# Altium PCB PCB2.PcbDoc
Units mm, origin at the board's own origin, x right, y up, seen from the top; angles counter-clockwise.
Board outline 57.5 x 65 mm, 2 copper layers (Top Layer, Bottom Layer); 16 components, 6 nets, 40 pads, 43 vias.
Unrouted connection lines stored in the file: 6.
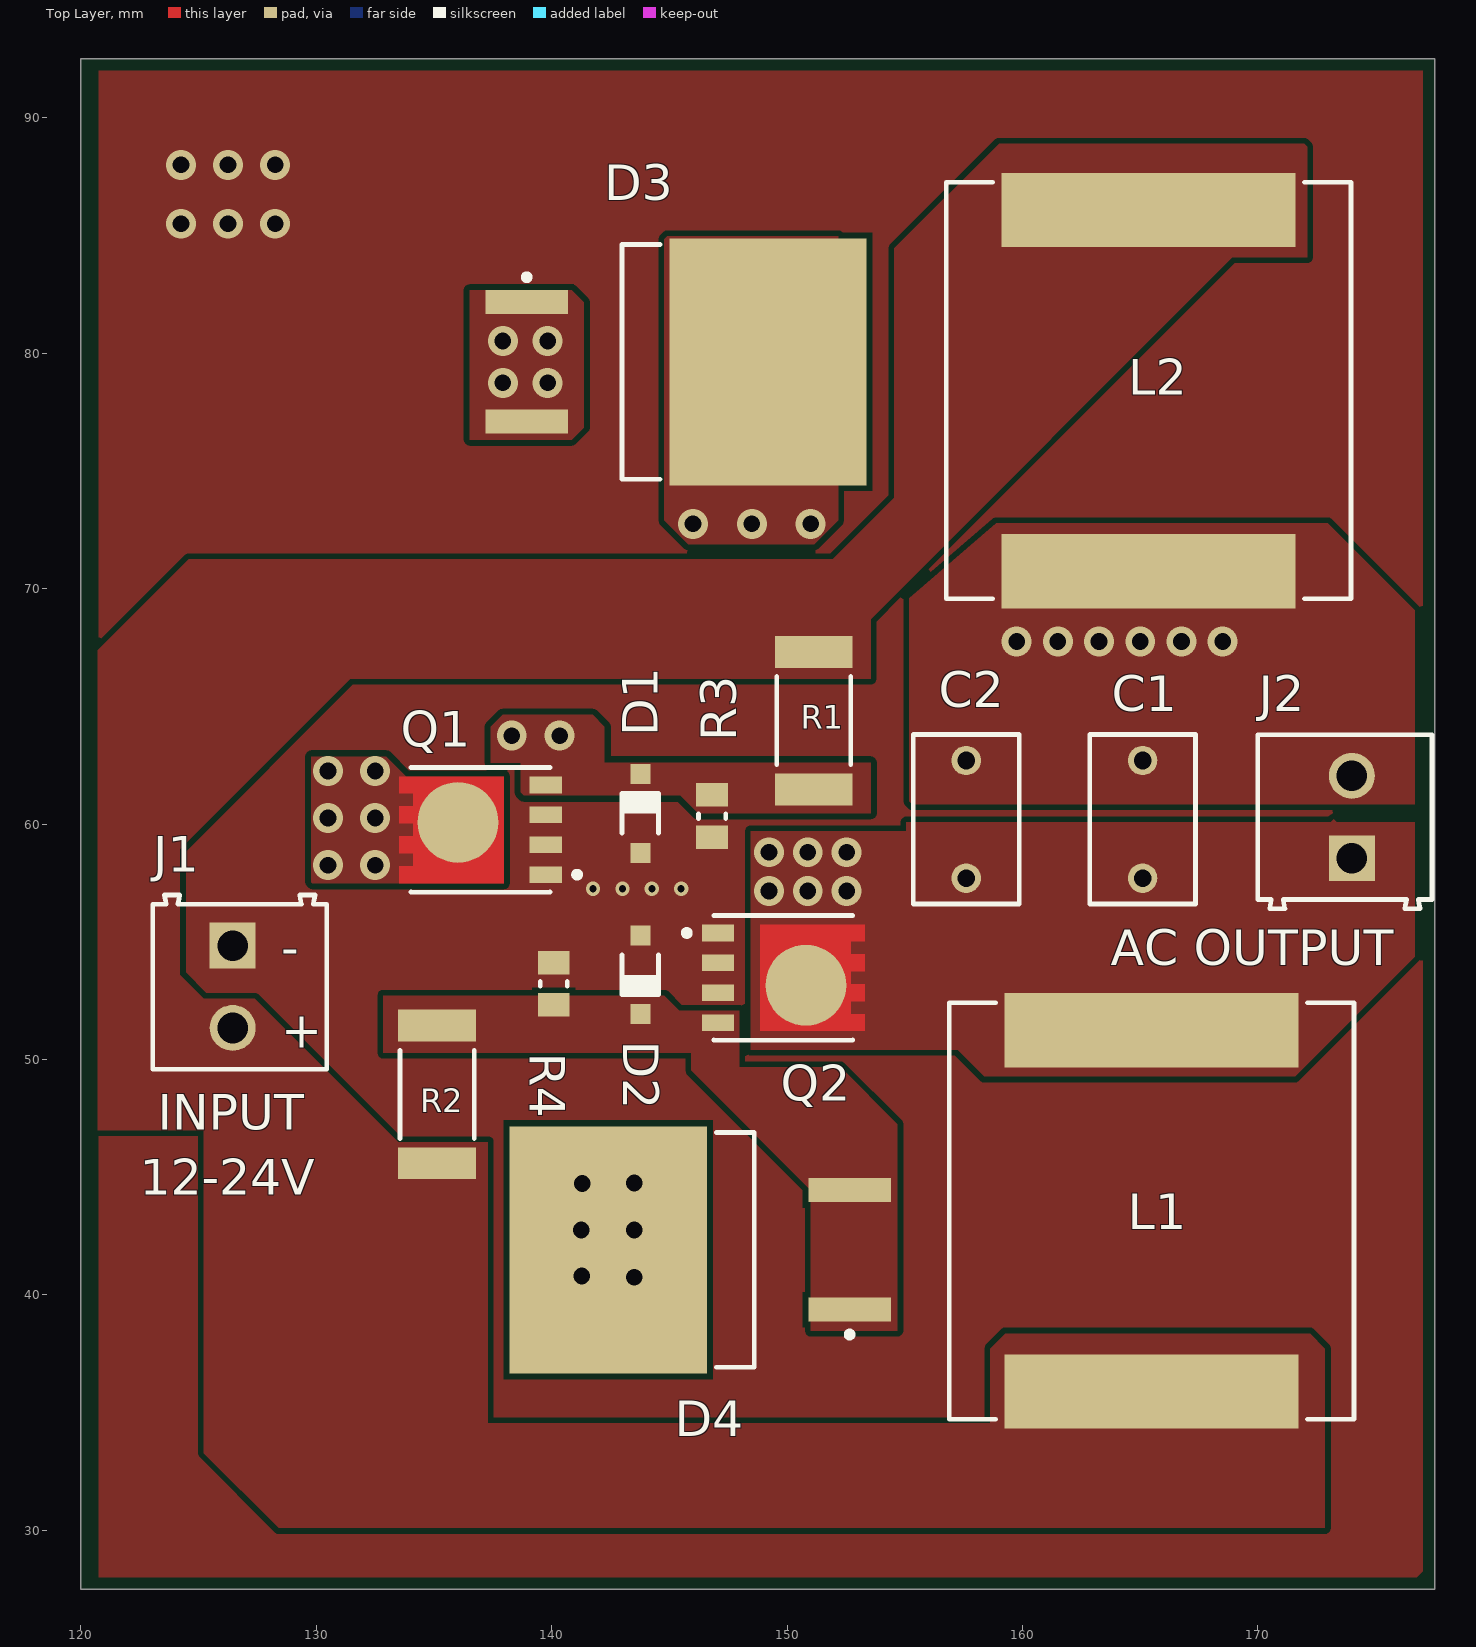
[diagram p0: Top Layer view]
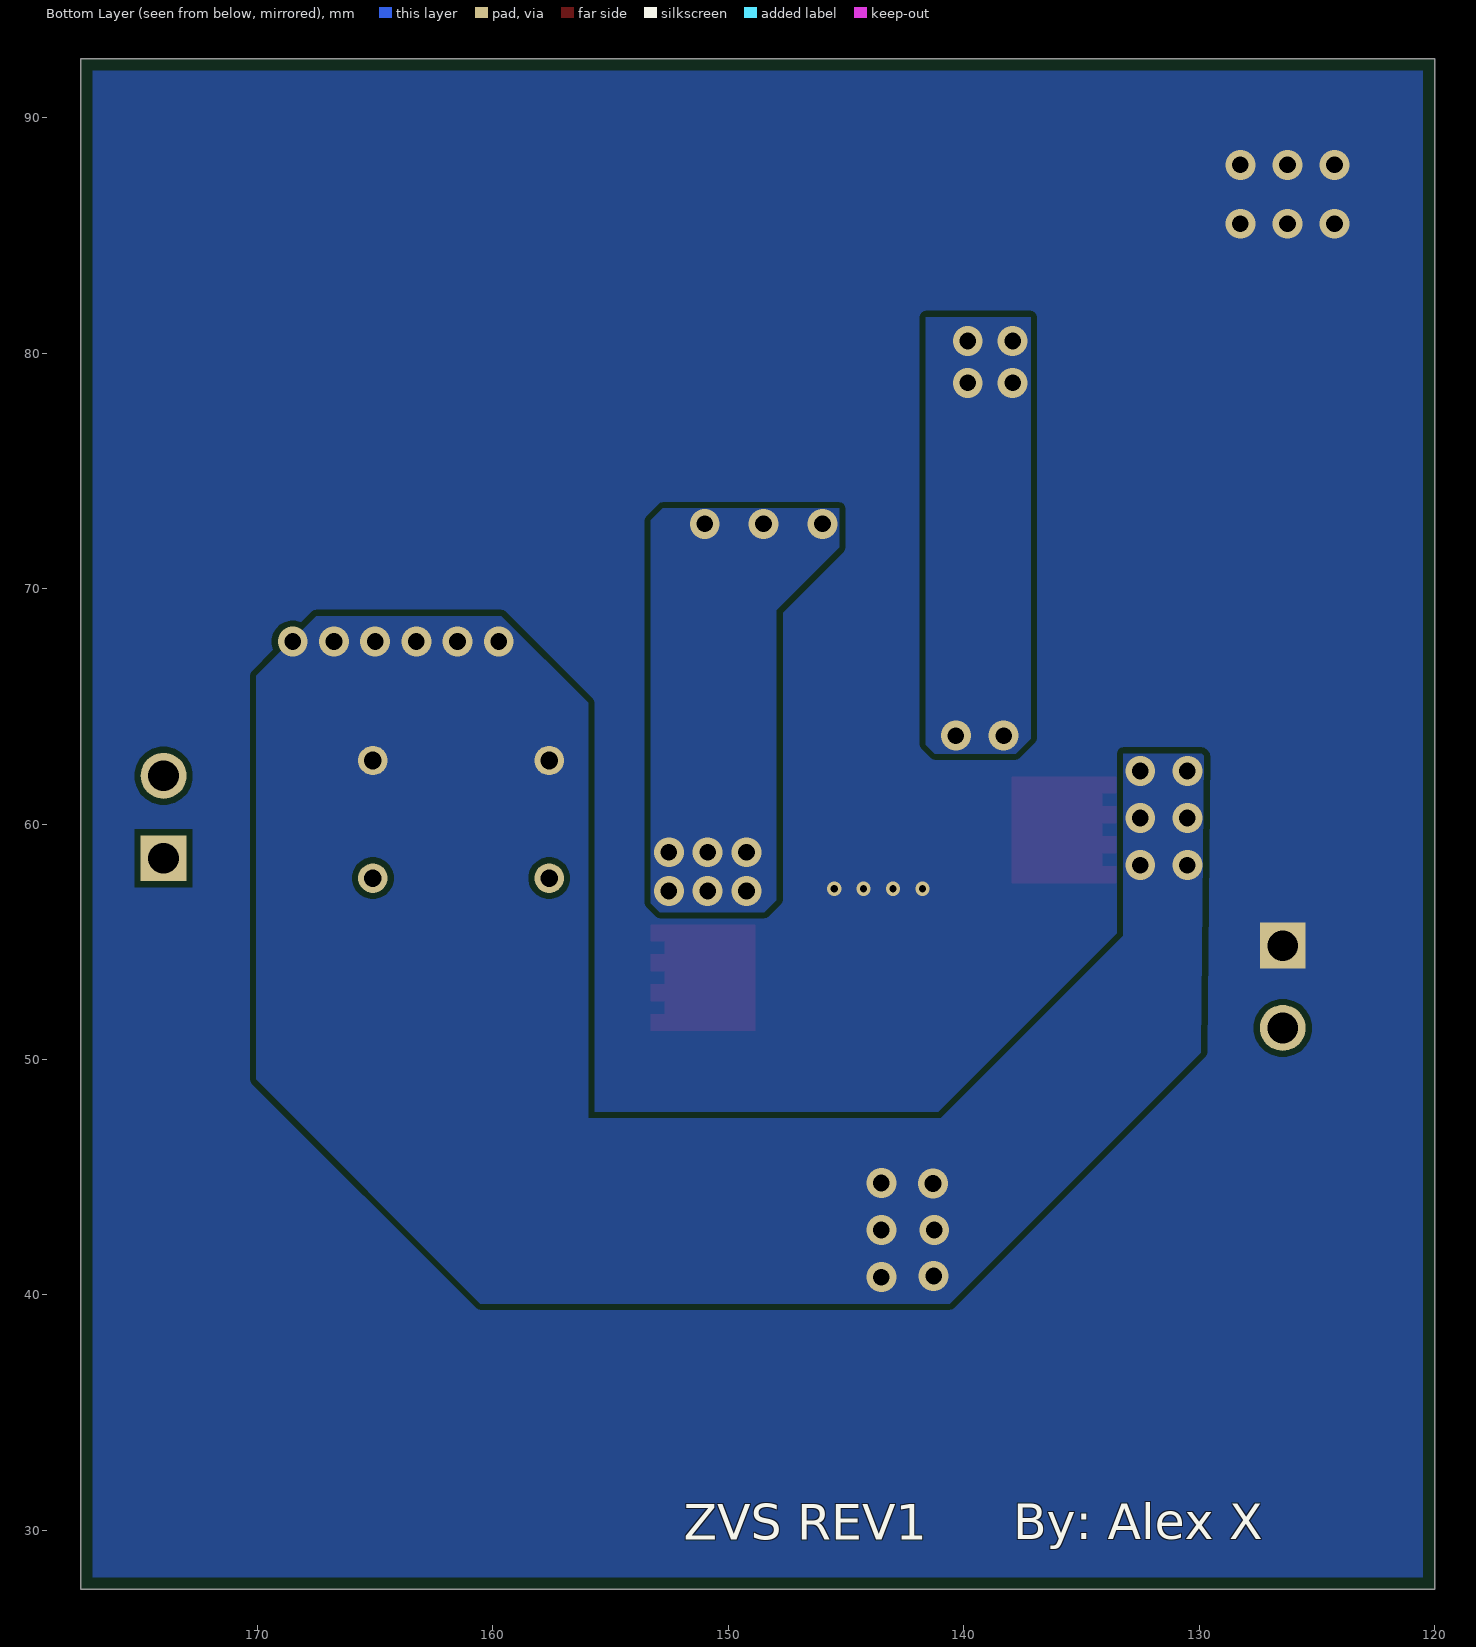
[diagram p1: Bottom Layer view, seen from below]
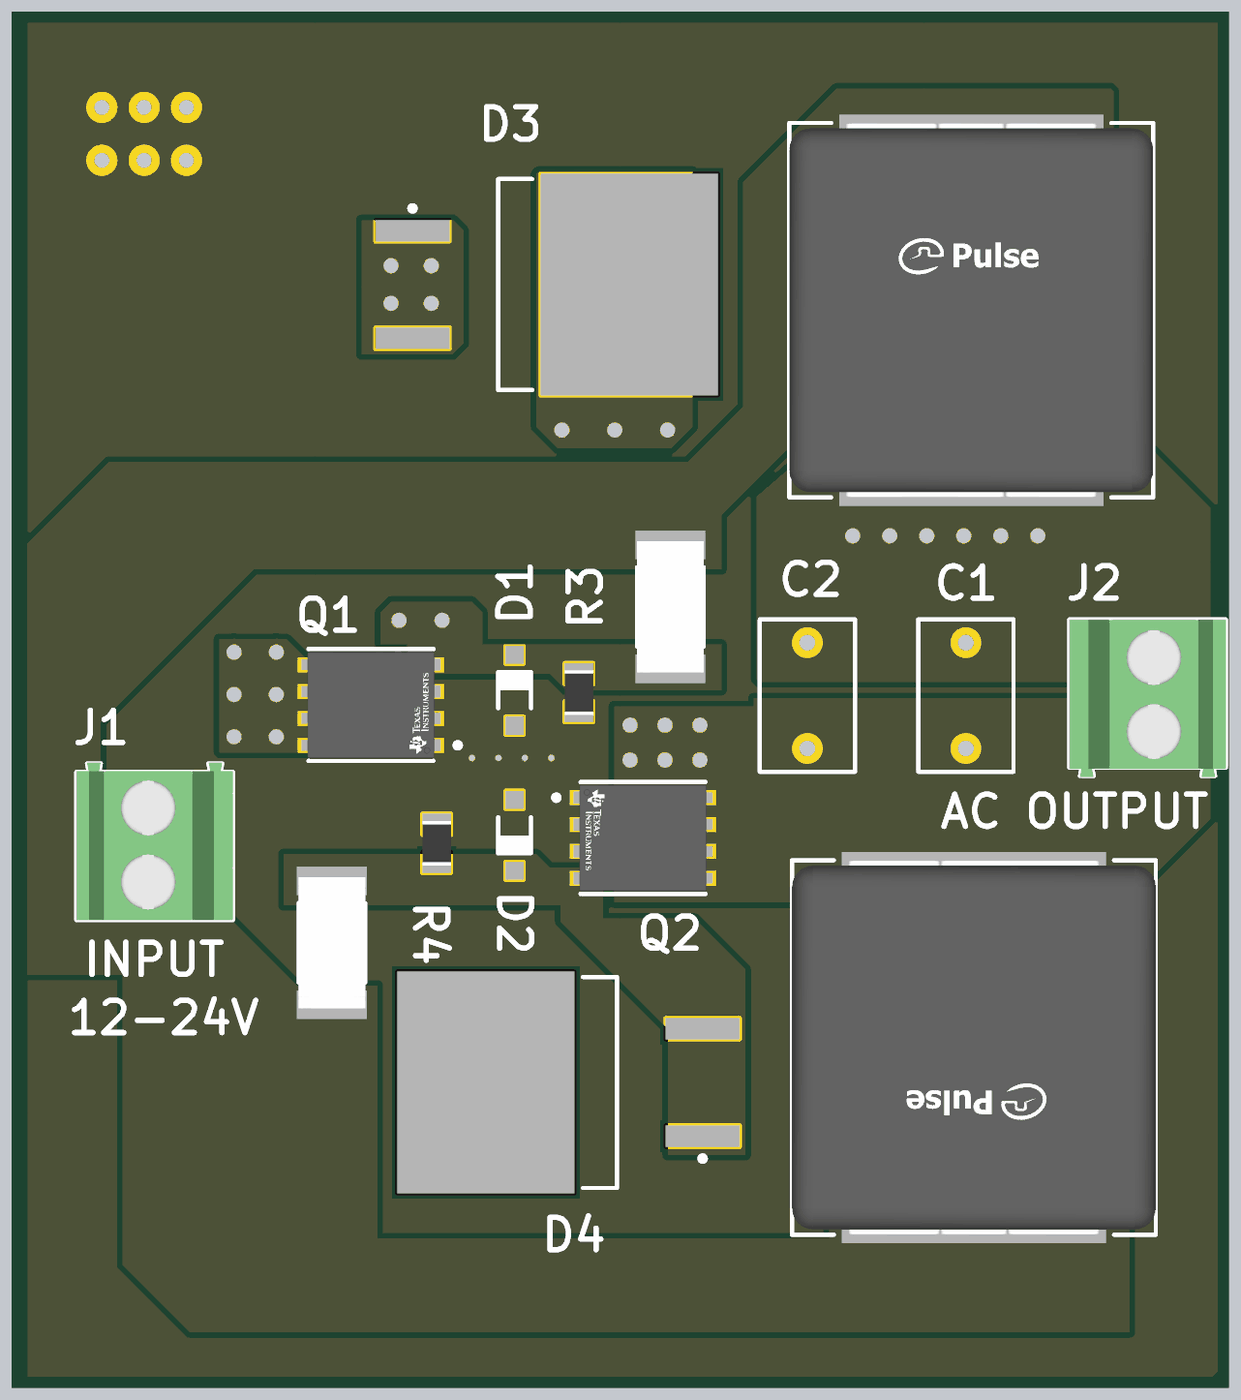
[diagram p2: 3D render of the assembled board from above, using the file's embedded part models]

## Layer stack, top to bottom
Top Solder: solder mask 0.0102, Solder Resist, Dk 3.5
Top Layer: signal copper 0.0356
Dielectric 1: dielectric 0.32, FR-4, Dk 4.8
Bottom Layer: signal copper 0.0356
Bottom Solder: solder mask 0.0102, Solder Resist, Dk 3.5

## Board outline
125,92.5 124.374,92.5 177.5,92.5 177.5,27.5 147.153,27.5 120,27.5 120,92.5 127.5,92.5

## Design rules (kind name [scope] priority, off if disabled: settings)
Clearance [All] p1: gap=0.254 ignorepadtopadclearanceinfootprint=FALSE except(0: Arc-Hole Track-Hole SMDPad-Hole THPad-Hole Via-Hole Fill-Hole Poly-Hole Region-Hole Text-Hole)
PolygonConnect [All] p1: connectstyle=Direct reliefconductorwidth=0.254 reliefentries=4 polygonreliefangle="90 Angle" airgapwidth=0.254
RoomDefinition zvs_circuit [InComponentClass('zvs_circuit')] p1: confinementstyle=ConfineIn formatcopy=TRUE lockcomponents=FALSE outline 110,11.306 191.667,11.306 191.667,101.75 110,101.75
RoutingVias [All] p1: holewidth=0.3 width=0.6 viastyle="Through Hole" minholewidth=0.25 minwidth=0.5 maxholewidth=0.711 maxwidth=2
SolderMaskExpansion [All] p1: expansion=0.102 istentingtop=FALSE
Width [All] p1: maxlimit=0.254 minlimit=0.254 preferedwidth=0.254
30 further rules are at their usual default settings.

## Components (designator, comment, footprint, x,y, rotation, side; value= is the part's Value field where it differs from the comment)
C1 "0.47uF" WIMA-MKS2D034701E00 165.1,60.198 r270 top
C2 "0.47uF" WIMA-MKS2D034701E00 157.607,60.198 r270 top
D1 "15V Zener" VISH-SOD-123-2_V 143.764,60.452 r90 top
D2 "15V Zener" VISH-SOD-123-2_V 143.764,53.594 r270 top
D3 "SBRB1045T4G" ONSC-D2PAK-3-418B-04_V 145.288,79.629 r0 top
D4 "SBRB1045T4G" ONSC-D2PAK-3-418B-04_V 146.304,41.91 r180 top
J1 "input" 691214110002 126.746,53.086 r270 top
J2 "output" 691214110002 173.69,60.297 r90 top
L1 "100uH" FP-PA4344_104NLT-MFG 165.481,43.561 r180 top
L2 "100uH" FP-PA4344_104NLT-MFG 165.354,78.414 r0 top
Q1 "CSD19502Q5B" FP-DNK0008A-MFG 136.975,59.753 r180 top
Q2 "CSD19502Q5B" FP-DNK0008A-MFG 149.836,53.467 r0 top
R1 "470" FP-CRCW2512-e3-IPC_B 151.13,64.389 r270 top
R2 "470" FP-CRCW2512-e3-IPC_B 135.128,48.514 r90 top
R3 "10K" RESC2013X60X35NL10T20 146.812,60.336 r90 top
R4 "10K" RESC2013X60X35NL10T20 140.081,53.213 r270 top

## Footprints (in the part's own frame and the unit in brackets; to place one, negate y for a bottom-side part, rotate by r counter-clockwise, add the part's x,y. Pads: shape width x height; smd on the part's side, far side on the other; paste and mask are expansions set on the pad)
691214110002 [mm] "3.50 mm Horizontal Entry Modular, 2p"
  rect 1.95x1.95 hole 1.3: 1(-1.75,-0.3)
  round 1.95 hole 1.3: 2(1.75,-0.3)
  silkscreen extent -3.9,-3.7 3.5,3.7, body extent -3.95,-3.7 3.5,3.7, height 8.55
FP-CRCW2512-e3-IPC_B [mm]
  rect 1.355x3.308 smd paste+0 mask+0: 1(-2.926,0) 2(2.926,0)
  silkscreen extent -1.87,-1.58 1.87,1.58, body extent -3.85,-1.9 3.85,1.9, height 0.25
FP-DNK0008A-MFG [mm]
  rect 1.372x0.71 smd paste-1000 mask+0: 1(-2.77,1.905) 2(-2.77,0.635) 3(-2.77,-0.635) 4(-2.77,-1.905)
  round 3.434 smd paste-1000 mask+0: 5-6-7-8(0.958,-0.317)
  Top Layer region: -0.984,-2.26 3.456,-2.26 3.456,-1.55 2.866,-1.55 2.866,-0.99 3.456,-0.99 3.456,-0.28 2.866,-0.28 2.866,0.28 3.456,0.28 3.456,0.99 2.866,0.99 2.866,1.55 3.456,1.55 3.456,2.26 -0.984,2.26
  silkscreen extent -4.23,-2.65 2.95,2.65, body extent -3.56,-2.65 3.56,2.65, height 0.25
FP-PA4344_104NLT-MFG [mm]
  rect 12.5x3.15 smd paste+0 mask+0: 1(0,7.675) 2(0,-7.675)
  silkscreen extent -8.6,-8.85 8.6,8.85, body extent -8.7,-9.35 8.7,9.35, height 0.25
ONSC-D2PAK-3-418B-04_V [mm] "DPAK, 3-Leads, Body 9.97x9.145mm, Pitch 2.54mm"
  rect 3.504x1.016 smd: 1(-6.35,2.54) 3(-6.35,-2.54)
  rect 8.38x10.49 smd: 4(3.9,0)
  silkscreen extent -6.47,-4.98 -0.69,4.98, body extent -2.3,-4.98 6.85,4.98, height 4.83
RESC2013X60X35NL10T20 [mm] "Chip Resistor, 2-Leads, Body 2.1x1.35mm, IPC Medium Density"
  rect 1x1.35 smd: 1(-0.9,0) 2(0.9,0)
  silkscreen extent -0.1,-0.58 0.1,0.58, body extent -1.05,-0.68 1.05,0.67, height 0.6
VISH-SOD-123-2_V [mm] "SMD, 2-Leads, Body 2.7x1.55mm, Height 1.35mm"
  rect 0.85x0.85 smd: 1(-1.675,0) 2(1.675,0)
  silkscreen extent -0.85,-0.77 0.85,0.78, body extent -1.35,-0.77 1.35,0.77, height 1.35
WIMA-MKS2D034701E00 [mm] "THD, 2-Leads, Body 7.2x4.5mm, Pitch 5mm"
  round 1.25 hole 0.75: 1(-2.5,0) 2(2.5,0)
  silkscreen extent -3.6,-2.25 3.6,2.25, body extent -3.6,-2.25 3.6,2.25, height 9.5

## Part data
C1 C2: library part CMP-2000-06717-1, "Metallized Polyester (PET) Capacitor, 0.47 uF, +/- 10%, 100 V DC, 63 V AC, -55 to 100 degC, 2-Pin THD, RoHS, Bulk", Capacitance=0.47µF, Capacitance Tolerance=±10%, Capacitor Case Style=-, Capacitor Dielectric Type=PET(Polyester), Capacitor Terminals=RadialLeaded, Manufacturer=Wima, Operating Temperature Max=100°C, Operating Temperature Min=-55°C, Package Description="2-Pin Through Hole Device, Body 7.2 x 4.5 mm, Pitch 5 mm", Package Reference=MKS2D034701E00, Voltage Rating=100V, Automotive Qualification Standard=-, Datasheet URL=http://www.wima.com/EN/WIMA_MKS_2.pdf, Datasheet Version=04/2016, Lead Spacing=5mm, Manufacturer URL=http://www.wima.com/, Mounting Technology=ThroughHole, Packaging=Each, Product Range=MKS2Series, SVHC=NoSVHC(15-Jun-2015)
D1 D2: library part CMP-0931-00033-1, "Small Signal Zener Diode, 15 V +/- 5%, -55 to 155 degC, 2-Pin SOD-123, RoHS, Tape and Reel", Manufacturer="Vishay Semiconductor", Operating Temperature="-55 to 150 degC", PartNumber=MMSZ5245B-E3-08, Power Dissipation (mW)=500, Test Current (IZT1) (mA)=8.5, Tolerance="+/- 5%", Zener Voltage (NOM.) (V)=15, ComponentLink1Description="Manufacturer URL", ComponentLink1URL=http://www.vishay.com/, ComponentLink2Description=Datasheet, ComponentLink2URL=http://www.vishay.com/docs/85774/mmsz5225.pdf, ComponentLink3Description="Package Specification", ComponentLink3URL=http://www.vishay.com/docs/85774/mmsz5225.pdf, DatasheetVersion="Rev. 1.9", Int. Construction=Single, Mounting Technology="Surface Mount", PackageDescription="2-Pin SMD, Body 2.7 x 1.55 mm, Height 1.35 mm", PackageReference=SOD-123-2, PackageVersion="Rev. 1.9", Packing="Tape and Reel", RoHS=TRUE, Zener Impedance (IZT1) (Max.) (Ohm)=16
D3 D4: library part CMP-1055-00091-1, "SWITCHMODE(TM) Schottky Power Rectifier, Surface Mount Power Package, 3-Pin D2PAK, Pb-Free, Tape and Reel", Manufacturer="On Semiconductor", ComponentLink1Description="Manufacturer URL", ComponentLink1URL=http://www.onsemi.com/, ComponentLink2Description=Datasheet, ComponentLink2URL=http://www.onsemi.cn/pub_link/Collateral/MBRB1045-D.PDF, ComponentLink3Description="Package Specification", ComponentLink3URL=http://www.onsemi.com/pub_link/Collateral/418B-04.PDF, Configuration=Single, DatasheetVersion="Rev. 8", IFSM Max (A)=150, Mounting Technology="Surface Mount", PackageDescription="3-Pin Flange Mount, Body 9.145 x 9.97 mm, Pitch 2.54 mm", PackageReference=D2PAK-3-418B-04, PackageVersion="Rev. K, 09/2008", Packing="Tape and Reel", PartNumber=SBRB1045T4G, RoHS=TRUE
J1 J2: library part CMP-1502-02464-1, "Serie 2141 - 3.50 mm Horizontal Entry Modular with Rising Cage Clamp WR-TBL, 2 pin", Manufacturer="Wurth Elektronik", Operating Temperature=-40to105degC, Package Reference=691214110002, Datasheet URL=http://katalog.we-online.de/em/datasheet/6912141100xx.pdf, Manufacturer URL=http://www.we-online.de, Mounting Technology=THT, Packaging=Box, Part Number=691214110002, Pin Number=2, Pitch=3.50mm, Publisher=WurthElektronik
L1 L2: library part CMP-16293-000004-1, "FIXED IND 100UH 5.3A 118 MOHM", Manufacturer="Pulse Electronics", Manufacturer Part Number=PA4344.104NLT, Package=0, Rms Current=5.3A, Saturation Current=6.5A, Series Resistance=118mΩ, Temperature="-55°C to +125°C", Temperature Range High=+125°C, Temperature Range Low=-55°C, Test Frequency=100kHz, Tolerance=20%, Automotive=No, Category=Ind, ComponentLink2Description=Datasheet, ComponentLink2URL=https://products.pulseelex.com/files/product_files/P771.pdf, Composition=Molded, Device Class L1="Passive Components", Device Class L2=Inductors, Device Class L3="Fixed Inductors", Digikey Description="FIXED IND 100UH 5.3A 118 MOHM", Height=7mm, Inductance=100uH, Lead Free=Yes, Octopart=https://octopart.com/pa4344.104nlt-pulse-65154399, RoHS=TRUE, Shielding=true
Q1 Q2: library part CMP-04962-000029-1, "MOSFET N-CH 80V 100A 8SON", Continuous Drain Current (ID)=100A, Drain To Source Breakdown Voltage=80V, Drain To Source Resistance=3.4mR, Gate to Source Voltage (Vgs)=20V, Input Capacitance=4.87nF, Max Operating Temperature=150°C, Max Power Dissipation=3.2W, Min Operating Temperature=-55°C, Package Quantity=2500, Threshold Voltage=2.7V, Drain to Source Voltage (Vdss)=80V, Element Configuration=Single, Fall Time=7ns, Lead Free="Contains Lead", Mount="Surface Mount", Number Of Channels=1, Number of Elements=1, Number of Pins=8, Packaging="Tape and Reel", Power Dissipation=3.2W, Rds On Max=4.1mR, REACH SVHC="No SVHC", Rise Time=6ns, RoHS Compliant=Yes, Turn-Off Delay Time=22ns, Turn-On Delay Time=8ns
R1 R2: library part CMP-02407-009143-1, "RES Thick Film, 470Ω, 1%, 1W, 100ppm/°C, 2512", Case Code (Imperial)=2512, Case Code (Metric)=6432, Max Operating Temperature=155°C, Max Power Dissipation=1W, Min Operating Temperature=-55°C, Package Quantity=10, Resistance=470R, Temperature Coefficient=100ppm/°C, Tolerance=1%, Voltage Rating (DC)=500V, Case/Package=2512, Composition="Thick Film", Contact Plating=Tin, Depth=3.15mm, Features="Automotive AEC-Q200", Height=0.028inch, Lead Free="Lead Free", Length=6.3mm, Military Standard=Not, Mount="Surface Mount", Number of Terminations=2, Packaging="Tape and Reel", Power Rating=1W, Radiation Hardening=No, Termination=SMD/SMT, Width=0.124inch
R3 R4: library part CMP-1659-00013-4, "Chip Resistor, 10 KOhm, +/- 1%, 0.125 W, -55 to 155 degC, 0805 (2012 Metric), RoHS, Tape and Reel", Manufacturer=Yageo, Max Operating Temperature="155 degC", Min Operating Temperature="-55 degC", Package Quantity=5000, Voltage Rating="150 V", ComponentLink1Description="Manufacturer URL", ComponentLink1URL=http://www.yageo.com/, ComponentLink2Description=Datasheet, ComponentLink2URL=http://www.yageo.com/documents/recent/PYu-RC_Group_51_RoHS_L_04.pdf, DatasheetVersion="Rev. 4, 02/2016", Height="0.5 mm", Length="2 mm", Mount="Surface Mount", Mounting Technology="Surface Mount", PackageDescription="2-Pin Surface Mounted Device, Body 2 x 1.25 mm", PackageReference=0805, Packaging="Tape and Reel", Pins=2, REACH SVHC="No SVHC", RoHSCompliant=true

## Via types
v1: diameter 1.27, hole 0.711, Top Layer to Bottom Layer, tented both sides, 27 vias
v2: diameter 1.27, hole 0.711, Top Layer to Bottom Layer, 12 vias
v3: diameter 0.6, hole 0.3, Top Layer to Bottom Layer, tented both sides, 4 vias

## Nets (pads, with @x,y where several pads share a name; then routed paths per layer and width w, separated by ;. In a path a pad name is that pad's centre, name@x,y a point inside that pad or via, vN(x,y) a via of type N, cw(c..) or ccw(c..) an arc to the next point about the centre after c; other vN are vias at no path point)
D2: C1.2 C2.2 D3.4 J2.1 L1.2 Q2.5-6-7-8
  other v1: 149.225,57.15 150.876,57.15 152.527,57.15 149.225,58.801 150.876,58.801 152.527,58.801 146,72.75 148.5,72.75 151,72.75
G1: D1.2 D3.1 D3.3 Q1.4 R1.2 R3.2
  other v1: 138.303,63.754 140.335,63.754 137.922,78.74 139.827,78.74 137.922,80.518 139.827,80.518
G2: D2.2 D4.1 D4.3 Q2.4 R2.2 R4.2
GND: D1.1 D2.1 J1.1 Q1.1 Q1.2 Q1.3 Q2.1 Q2.2 Q2.3 R3.1 R4.1
  other v2: 124.25,85.5 126.25,85.5 128.25,85.5 124.25,88 126.25,88 128.25,88
  other v3: 141.75,57.25 143,57.25 144.25,57.25 145.5,57.25
NetC1_1: C1.1 C2.1 D4.4 J2.2 L2.2 Q1.5-6-7-8
  other v1: 130.5,58.25 132.5,58.25 130.5,60.25 132.5,60.25 130.5,62.25 132.5,62.25 159.75,67.75 161.5,67.75 163.25,67.75 165,67.75 166.75,67.75 168.5,67.75
  other v2: 143.5,40.75 141.275,40.8 141.25,42.75 143.5,42.75 141.3,44.725 143.5,44.75
Vin: J1.2 L1.1 L2.1 R1.1 R2.1

## Polygon pours and split planes (outlines as drawn)
GND on Top Layer "GND_L01_P022" (solid, pour order 22): 120.75,92 177,92 177,28.25 176.75,28 120.75,28
Vin on Top Layer "VIN_L01_P011" (solid, pour order 11): 148.971,68.707 148.971,66.929 149.733,66.167 153.543,66.167 153.543,68.707 168.91,84.074 172.085,84.074 172.085,88.773 171.958,88.9 159.004,88.9 154.559,84.455 154.559,73.859 150.388,69.688
G1 on Top Layer "G1_L01_P000" (solid, pour order 0): 138.811,61.214 145.459,61.214 146.237,60.436 146.253,60.452 153.543,60.452 153.543,62.611 153.035,62.611 138.684,62.611 138.684,61.341
G2 on Top Layer "G2_L01_P002" (solid, pour order 2): 151.003,38.481 154.686,38.481 154.686,44.831 151.003,44.831
G2 on Top Layer "G2_L01_P003" (solid, pour order 3): 147.701,52.07 147.701,50.292 132.842,50.292 132.842,52.705 140.208,52.705 144.78,52.705 145.161,52.324 145.415,52.07
GND on Top Layer "GND_L01_P004" (solid, pour order 4): 139.065,57.404 139.065,60.706 141.859,60.706 143.256,59.309 145.415,59.309 146.05,59.944 147.701,59.944 147.701,57.404
GND on Top Layer "GND_L01_P005" (solid, pour order 5): 147.701,57.785 147.701,52.578 146.177,52.578 144.145,54.61 141.732,54.61 141.097,53.975 141.097,53.467 139.446,53.467 139.065,53.848 139.065,57.785
GND on Top Layer "GND_L01_P006" (solid, pour order 6): 125.095,56.261 139.827,56.261 140.272,55.816 140.272,53.467 125.095,53.467
NetC1_1 on Top Layer "NETC1_1_L01_P007" (solid, pour order 7): 158.877,72.771 172.974,72.771 176.657,69.088 176.657,60.833 155.321,60.833 155.194,60.96 155.194,69.596
D2 on Top Layer "D2_L01_P008" (solid, pour order 8): 155.067,60.071 173.101,60.071 173.228,60.198 173.355,60.071 176.657,60.071 176.657,54.356 171.577,49.276 158.369,49.276 155.067,52.578
Vin on Top Layer "VIN_L01_P009" (solid, pour order 9): 125.222,52.578 127.381,52.578 133.477,46.482 137.287,46.482 137.287,34.544 158.623,34.544 158.623,37.719 159.258,38.354 172.212,38.354 172.847,37.719 172.847,30.099 128.397,30.099 125.222,33.274
D2 on Top Layer "D2_L01_P010" (solid, pour order 10): 148.463,59.69 158.1,59.69 158.1,50.419 154.559,50.419 148.463,50.419
Vin on Top Layer "VIN_L01_P012" (solid, pour order 12): 127.647,46.99 120.725,46.99 120.725,67.385 124.587,71.247 154.178,71.247 152.59,68.135 152.4,67.945 152.4,66.167 131.445,66.167 124.206,58.928 124.206,53.594 125.222,52.578 127.381,52.578
D2 on Top Layer "D2_L01_P014" (solid, pour order 14): 144.907,84.963 144.78,84.836 144.78,72.898 145.796,71.882 151.159,71.882 152.175,72.898 152.175,84.963
G2 on Top Layer "G2_L01_P015" (solid, pour order 15): 145.923,52.07 145.923,49.53 151.003,44.45 151.003,38.481 154.686,38.481 154.686,47.244 152.273,49.657 147.955,49.657 147.955,52.07
NetC1_1 on Top Layer "NETC1_1_L01_P017" (solid, pour order 17): 137.96,62.014 133.82,62.014 132.969,62.865 129.794,62.865 129.794,57.531 129.832,57.493 137.96,57.493
G1 on Top Layer "G1_L01_P018" (solid, pour order 18): 136.525,82.677 140.843,82.677 141.351,82.169 141.351,76.835 140.843,76.327 136.525,76.327
G1 on Top Layer "G1_L01_P019" (solid, pour order 19): 142.24,64.135 141.732,64.643 137.922,64.643 137.414,64.135 137.414,62.611 139.954,62.611 140.97,61.595 142.24,61.595
GND on Bottom Layer "GND_L02_P021" (solid, pour order 21): 120.5,92 177,92 177,91.75 177,28 120.5,28
D2 on Bottom Layer "D2_L02_P013" (solid, pour order 13): 145.288,73.406 152.781,73.406 153.289,72.898 153.289,56.642 152.908,56.261 148.463,56.261 147.955,56.769 147.955,69.088 145.288,71.755
NetC1_1 on Bottom Layer "NETC1_1_L02_P016" (solid, pour order 16): 129.794,62.992 133.223,62.992 133.223,55.245 140.97,47.498 155.956,47.498 155.956,65.151 159.639,68.834 167.513,68.834 170.053,66.294 170.053,49.149 160.528,39.624 140.589,39.624 129.921,50.292 129.921,50.419
G1 on Bottom Layer "G1_L02_P020" (solid, pour order 20): 137.16,81.534 137.16,63.627 137.795,62.992 141.224,62.992 141.605,63.373 141.605,81.534

## Silkscreen, mask and mechanical layers (free items; w line width, h text height)
Top Overlay:
  text "-" at 128.504,53.992 h1.52
  text "AC OUTPUT" at 163.754,54.004 h1.52
  text "+" at 128.504,50.5 h1.52
  text "INPUT" at 123.254,47.004 h1.52
  text "12-24V" at 122.504,44.254 h1.52
Bottom Overlay:
  text "By: Alex X" at 137.896,29.612 h1.52
  text "ZVS REV1" at 151.896,29.604 h1.52
outline:
  lines w0.254: 120,27.5 120,92.5 177.5,92.5 177.5,27.5 120,27.5